# Altium PCB TX2_PowerBoard.PcbDoc
Units mil, origin at the board's own origin, x right, y up, seen from the top; angles counter-clockwise.
Board outline 2900 x 1800 mil, 2 copper layers (Top Layer, Bottom Layer); 31 components, 9 nets, 87 pads, 2 vias.
Unrouted connection lines stored in the file: 8.
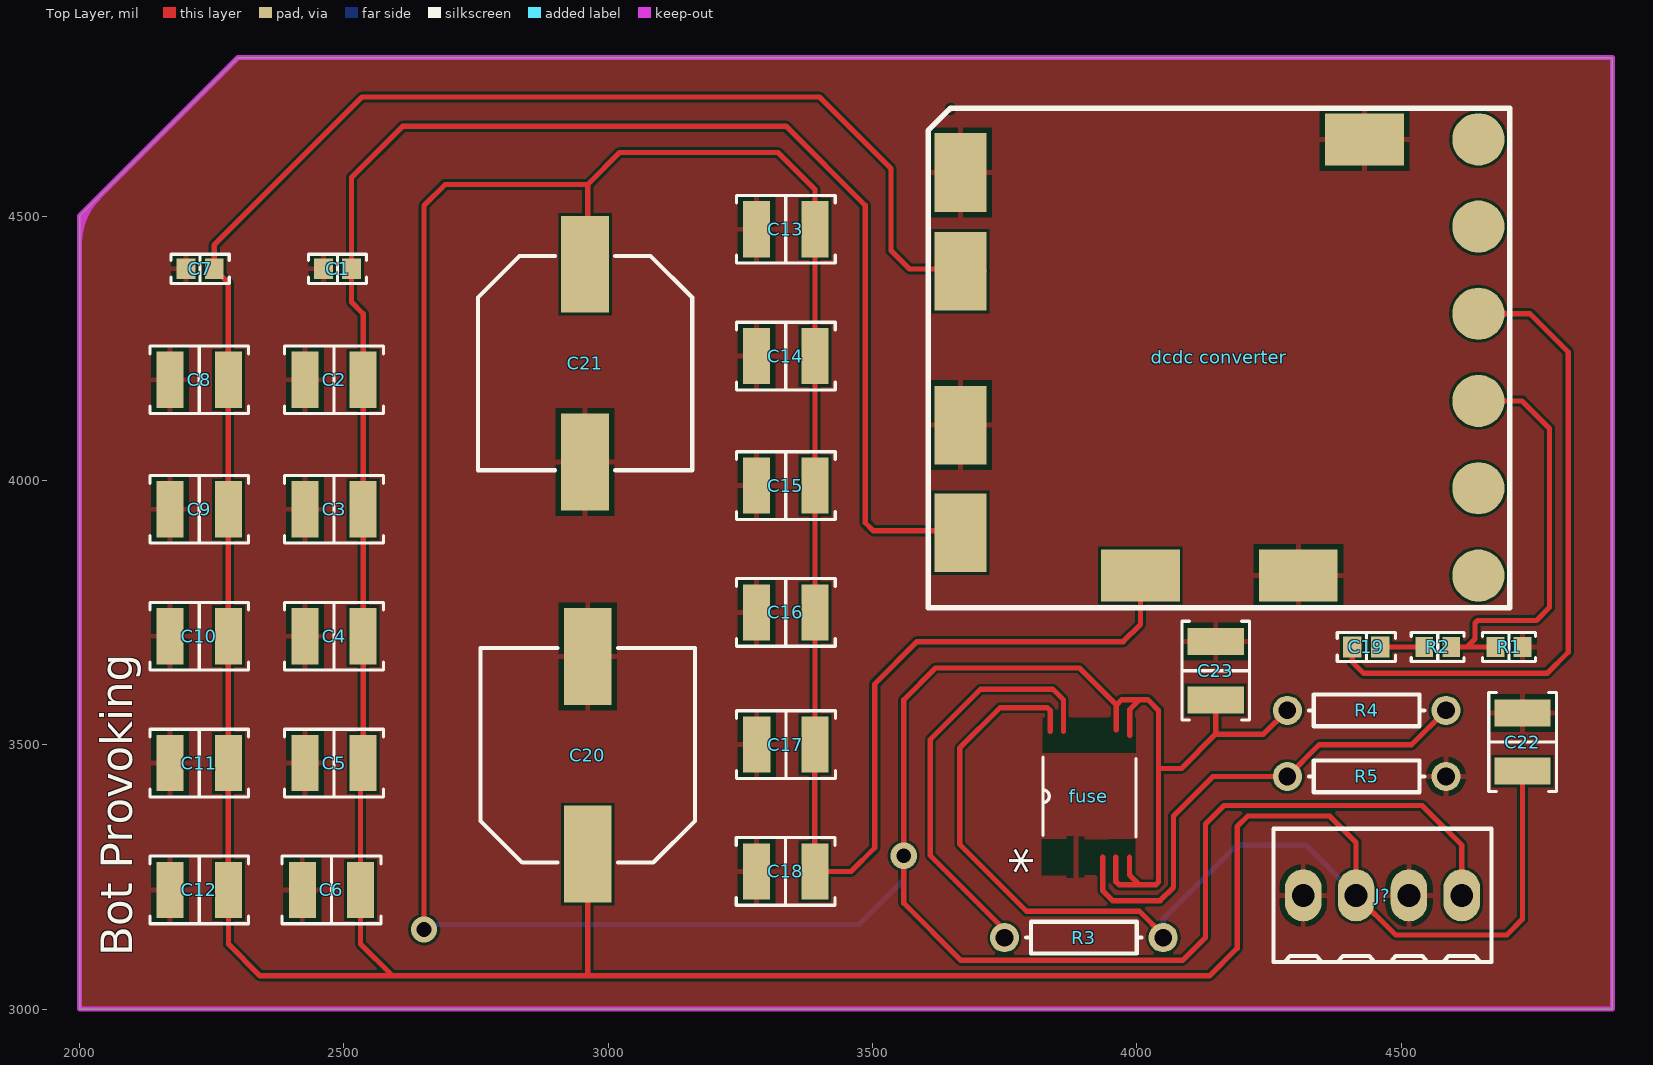
[diagram p0: Top Layer view]
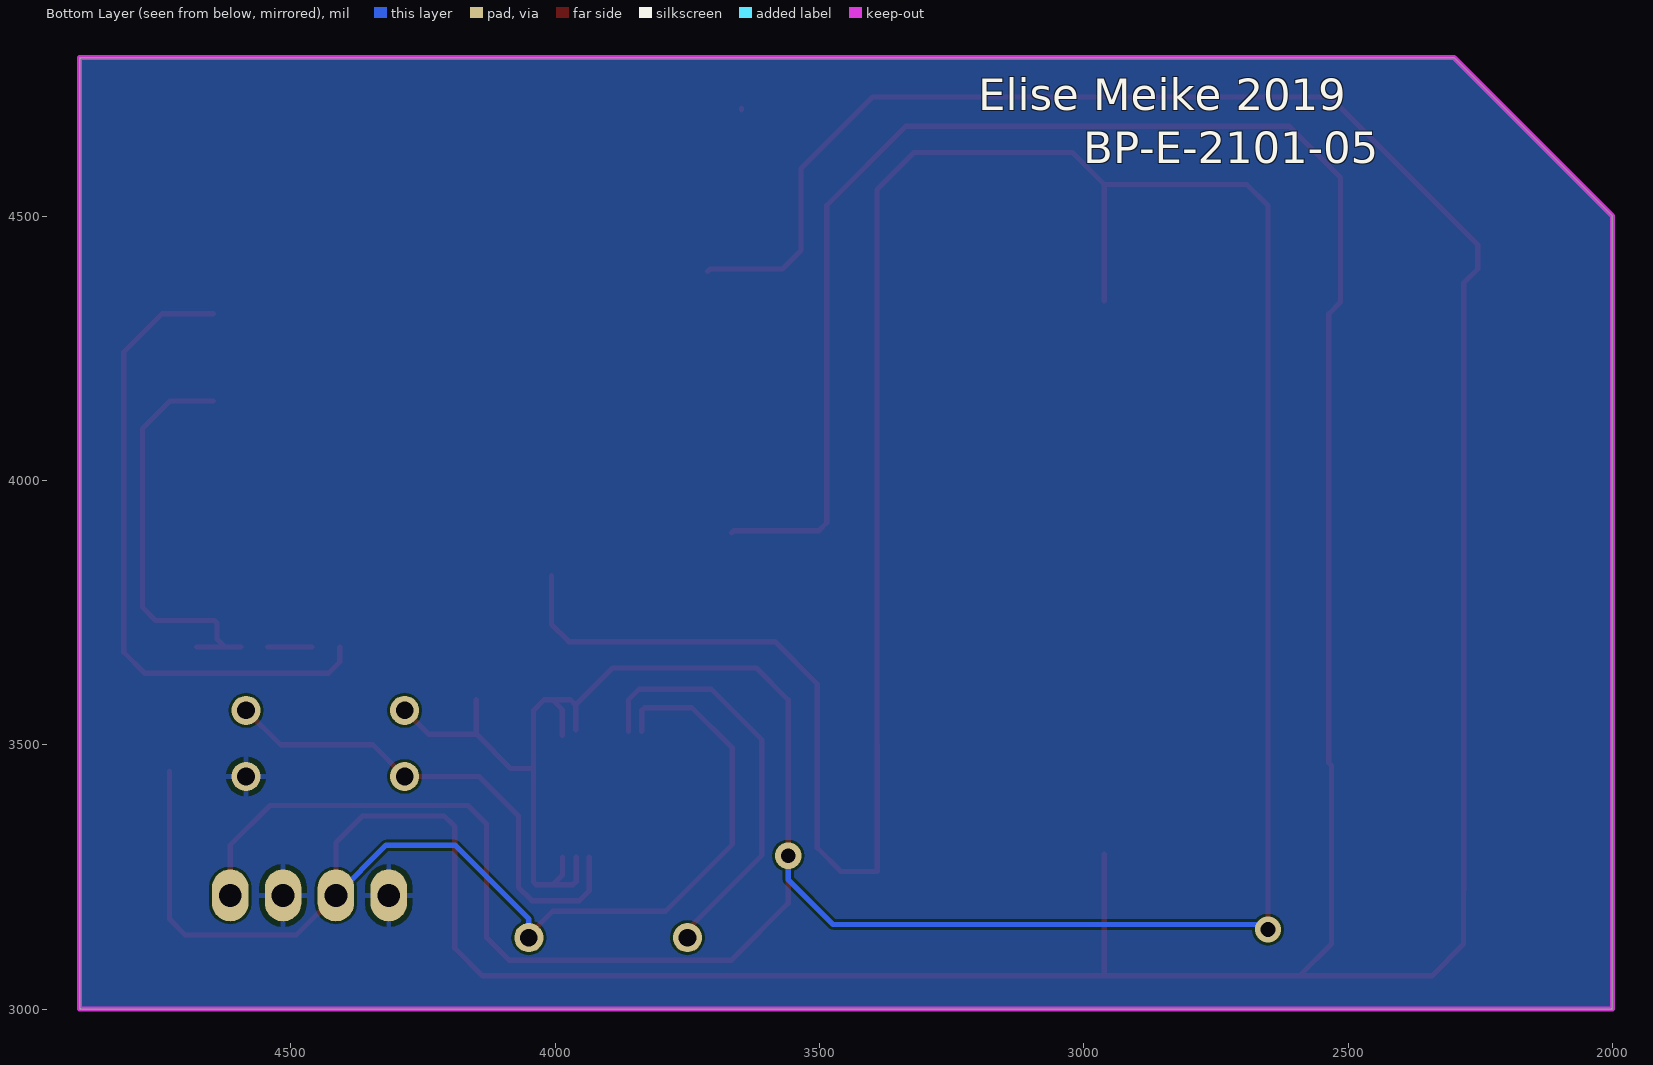
[diagram p1: Bottom Layer view, seen from below]
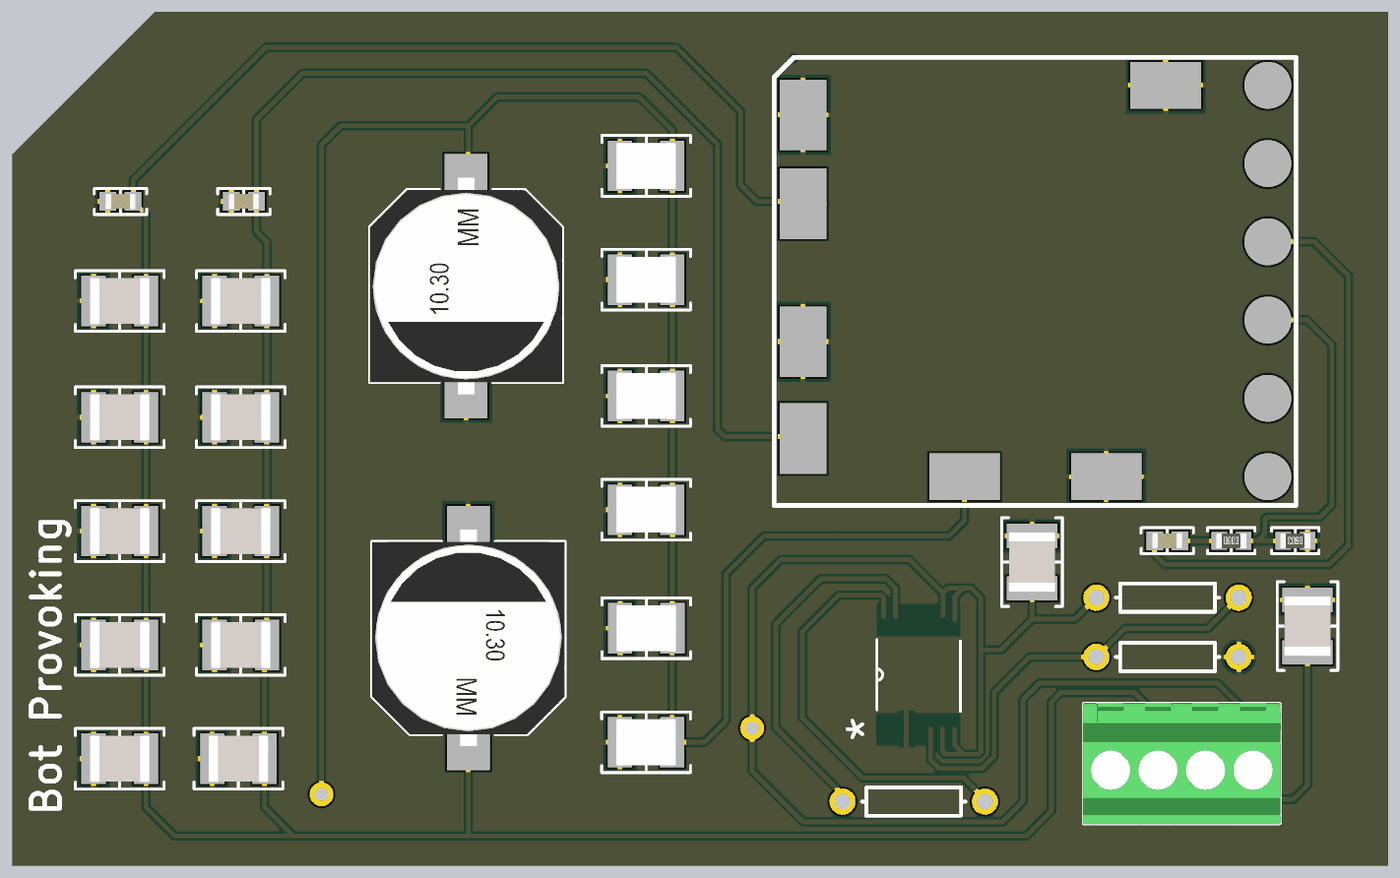
[diagram p2: 3D render of the assembled board from above, using the file's embedded part models]

## Layer stack, top to bottom
Top Solder: solder mask 0.4, Solder Resist, Dk 3.5
Top Layer: signal copper 1.4
Dielectric 1: dielectric 12.6, FR-4, Dk 4.8
Bottom Layer: signal copper 1.4
Bottom Solder: solder mask 0.4, Solder Resist, Dk 3.5

## Board outline
2000,4500 2300,4800 4900,4800 4900,3000 2000,3000

## Design rules (kind name [scope] priority, off if disabled: settings)
Clearance [All] p1: gap=5 ignorepadtopadclearanceinfootprint=FALSE except(0: Arc-Hole Track-Hole SMDPad-Hole THPad-Hole Via-Hole Fill-Hole Poly-Hole Region-Hole Text-Hole)
PolygonConnect [All] p1: connectstyle=Relief reliefconductorwidth=10 reliefentries=4 polygonreliefangle="90 Angle" airgapwidth=10
RoomDefinition TX2_PowerBoard [InComponentClass('TX2_PowerBoard')] p1: confinementstyle=ConfineIn formatcopy=TRUE lockcomponents=FALSE outline 1236.53,935.2 6906.53,935.2 6906.53,4955.04 1236.53,4955.04
RoutingVias [All] p1: holewidth=28 width=50 viastyle="Through Hole" minholewidth=28 minwidth=50 maxholewidth=28 maxwidth=50
SolderMaskExpansion [All] p1: expansion=4
Width [All] p1: maxlimit=10 minlimit=10 preferedwidth=10
30 further rules are at their usual default settings.

## Components (designator, comment, footprint, x,y, rotation, side; value= is the part's Value field where it differs from the comment)
C1 "0.047uF" "CAP 0603/1608" 2487.98,4400.35 r180 top
C2 "4.7uF" "CAP 1210/3225 - 2.2MM" 2481.41,4190.35 r0 top
C3 "4.7uF" "CAP 1210/3225 - 2.2MM" 2481.41,3945.35 r0 top
C4 "4.7uF" "CAP 1210/3225 - 2.2MM" 2481.41,3705.35 r0 top
C5 "4.7uF" "CAP 1210/3225 - 2.2MM" 2481.53,3465.35 r0 top
C6 "4.7uF" "CAP 1210/3225 - 2.2MM" 2476.53,3225.35 r0 top
C7 "0.047uF" "CAP 0603/1608" 2227.98,4400.35 r180 top
C8 "4.7uF" "CAP 1210/3225 - 2.2MM" 2226.41,4190.35 r0 top
C9 "4.7uF" "CAP 1210/3225 - 2.2MM" 2226.41,3945.35 r0 top
C10 "4.7uF" "CAP 1210/3225 - 2.2MM" 2226.41,3705.35 r0 top
C11 "4.7uF" "CAP 1210/3225 - 2.2MM" 2226.41,3465.35 r0 top
C12 "4.7uF" "CAP 1210/3225 - 2.2MM" 2226.41,3225.35 r0 top
C13 "4.7uF" "CAP 1210/3225 - 2.8MM" 3336.06,4475.35 r0 top
C14 "4.7uF" "CAP 1210/3225 - 2.8MM" 3336.06,4235.35 r0 top
C15 "4.7uF" "CAP 1210/3225 - 2.8MM" 3336.06,3990.35 r0 top
C16 "4.7uF" "CAP 1210/3225 - 2.8MM" 3336.06,3750.35 r0 top
C17 "4.7uF" "CAP 1210/3225 - 2.8MM" 3336.29,3500.35 r0 top
C18 "4.7uF" "CAP 1210/3225 - 2.8MM" 3335.82,3260.2 r0 top
C19 "470pF" "CAP 0603/1608" 4434.41,3685 r0 top
C20 "470uF" "CAP ALUM 10.3MM" 2961.41,3480 r90 top
C21 "470uF" "CAP ALUM 10.3MM" 2956.41,4222.01 r270 top
C22 "4.7uF" "CAP 1210/3225 - 2.2MM" 4730,3505 r270 top
C23 "4.7uF" "CAP 1210/3225 - 2.2MM" 4149.41,3640 r270 top
"dcdc converter" "DC to DC stepup converter" ABXS005S4X341-SRZ 4705.46,4704.25 r180 top
fuse "4 amp fuse" TSSOP-14 3910,3400 r90 top
J? "282834-4" "TE 282834-4" 4465,3215 r180 top
R1 "13.7k" "RES 0603/1608" 4704.41,3685 r180 top
R2 "200k" "RES 0603/1608" 4569.41,3685 r0 top
R3 "Res1" AXIAL-0.3 3900,3135 r0 top value=1K
R4 "Res1" AXIAL-0.3 4435,3565 r180 top value=1K
R5 "Res1" AXIAL-0.3 4435,3440 r180 top value=1K

## Footprints (in the part's own frame and the unit in brackets; to place one, negate y for a bottom-side part, rotate by r counter-clockwise, add the part's x,y. Pads: shape width x height; smd on the part's side, far side on the other; paste and mask are expansions set on the pad)
ABXS005S4X341-SRZ [mm]
  rect 3.78x2.51 smd: 1(10.15,22.46) 2(17.74,22.46) 7(6.97,1.5)
  rect 2.51x3.78 smd: 3(26.39,20.41) 4(26.39,15.23) 5(26.39,7.84) 6(26.39,3.09)
  round 2.51 smd: 8(1.5,1.5) 9(1.5,5.69) 10(1.5,9.88) 11(1.5,14.07) 12(1.5,18.26) 13(1.5,22.46)
  Top Layer lines w0.254: 26.87,0.073 26.87,0
  silkscreen extent 0,0 27.94,24
AXIAL-0.3 [mm] "Axial Device, Thru-Hole; 2 Leads; 0.3 in Pin Spacing"
  round 1.4 hole 0.85: 1(-3.81,0) 2(3.81,0)
  silkscreen extent -2.77,-0.76 2.77,0.76
"CAP 0603/1608" [mm] "Chip Capacitor, 2-Leads, Body 1.60x0.80mm, IPC Medium Density"
  rect 0.9x1 smd: 1(-0.675,0) 2(0.675,0)
  silkscreen extent -1.4,-0.7 1.4,0.7, body extent -0.8,-0.41 0.8,0.41, height 0.82
"CAP 1210/3225 - 2.2MM" [mm] "Chip Capacitor, 2-Leads, Body 3.20x2.50mm, IPC Medium Density"
  rect 1.3x2.7 smd: 1(-1.4,0) 2(1.4,0)
  silkscreen extent -2.37,-1.63 2.37,1.63, body extent -1.6,-1.25 1.6,1.25, height 2.2
"CAP 1210/3225 - 2.8MM" [mm] "Chip Capacitor, 2-Leads, Body 3.20x2.50mm, IPC Medium Density"
  rect 1.3x2.7 smd: 1(-1.4,0) 2(1.4,0)
  silkscreen extent -2.37,-1.63 2.37,1.63, body extent -1.6,-1.25 1.6,1.25, height 2.8
"CAP ALUM 10.3MM" [mm] "Aluminum Electrolytic Capacitor, Body 10.30x10.30x10.50mm, IPC Low Density"
  rect 4.65x2.3 smd: 1(-4.75,0) 2(4.75,0)
  silkscreen extent -5.15,-5.15 5.15,5.15, body extent -5.8,-5.15 5.8,5.15, height 10.5
"RES 0603/1608" [mm] "Chip Resistor, 2-Leads, Body 1.60x0.80mm, IPC Medium Density"
  rect 0.85x0.95 smd: 1(-0.65,0) 2(0.65,0)
  silkscreen extent -1.27,-0.7 1.27,0.7, body extent -0.8,-0.4 0.8,0.4, height 0.45
"TE 282834-4" [mm]
  oval 1.75x2.5 hole 1.1: 1(-3.81,0) 2(-1.27,0) 3(1.27,0) 4(3.81,0)
  silkscreen extent -5.24,-3.2 5.24,3.2, body extent -5.31,-3.25 5.31,3.25, height 10
TSSOP-14 [mil]
  rect 58x14 on Mech1: 1(-112.5,77.5) 2(-112.5,51.5) 3(-112.5,25.5) 4(-112.5,0.5) 5(-112.5,-25.5) 6(-112.5,-50.5) 7(-112.5,-76.5) 8(117.75,-76.75) 9(117.5,-51.5) 10(117.5,-25.5) 11(117.5,0.5) 12(117.5,25.5) 13(117.5,51.5) 14(117.5,76.5)
  silkscreen extent -74,-88 76,88

## Part data
C1 C7: library part GCM188R71H473KA55D, "CAP CER 0.047UF 50V X7R 0603", Device Package="0603 (1608 Metric)", Manufacturer="Murata Electronics North America", Supplier Part Number 1=490-4934-2-ND, TemperatureCoefficient=X7R, TemperatureRange="-55C ~ 125C", Tolerance=10%, Voltage=50V, ComponentLink1Description=Datasheet, ComponentLink1URL=http://www.murata.com/~/media/webrenewal/support/library/catalog/products/capacitor/mlcc/c03e.ashx, ComponentLink2Description="Digi-Key Listing", ComponentLink2URL=https://www.digikey.com/product-detail/en/murata-electronics-north-america/GCM188R71H473KA55D/490-4934-2-ND/1765182, PartId=12944, Part Number=GCM188R71H473KA55D, Price=0.0193, Supplier 1=Digi-Key
C2 C3 C4 C5 C6 C8 C9 C10 C11 C12 C22 C23: library part GCM32DR71E475KA55L, "CAP CER 4.7UF 25V X7R 1210", Device Package="1210 (3225 Metric)", Manufacturer="Murata Electronics North America", Supplier Part Number 1=490-8063-2-ND, TemperatureCoefficient=X7R, TemperatureRange="-55C ~ 125C", Tolerance=10%, Voltage=25V, ComponentLink1Description=Datasheet, ComponentLink1URL=http://www.murata.com/~/media/webrenewal/support/library/catalog/products/capacitor/mlcc/c03e.ashx, ComponentLink2Description="Digi-Key Listing", ComponentLink2URL=https://www.digikey.com/product-detail/en/murata-electronics-north-america/GCM32DR71E475KA55L/490-8063-2-ND/2592481, PartId=18697, Part Number=GCM32DR71E475KA55L, Price=0.428, Supplier 1=Digi-Key
C13 C14 C15 C16 C17 C18: library part GCM32ER71H475KA55K, "CAP CER 4.7UF 50V X7R 1210", Device Package="1210 (3225 Metric)", Manufacturer="Murata Electronics North America", Supplier Part Number 1=490-8066-2-ND, TemperatureCoefficient=X7R, TemperatureRange="-55C ~ 125C", Tolerance=10%, Voltage=50V, ComponentLink1Description=Datasheet, ComponentLink1URL=http://www.murata.com/~/media/webrenewal/support/library/catalog/products/capacitor/mlcc/c03e.ashx, ComponentLink2Description="Digi-Key Listing", ComponentLink2URL=https://www.digikey.com/product-detail/en/murata-electronics-north-america/GCM32ER71H475KA55K/490-8066-2-ND/2592491, PartId=19150, Part Number=GCM32ER71H475KA55K, Price=0.6447, Supplier 1=Digi-Key
C19: library part GCM1885C2A471JA16D, "CAP CER 470PF 100V NP0 0603", Device Package="0603 (1608 Metric)", Manufacturer="Murata Electronics North America", Supplier Part Number 1=490-4949-2-ND, TemperatureCoefficient="C0G, NP0", TemperatureRange="-55C ~ 125C", Tolerance=5%, Voltage=100V, ComponentLink1Description=Datasheet, ComponentLink1URL=http://www.murata.com/~/media/webrenewal/support/library/catalog/products/capacitor/mlcc/c03e.ashx, ComponentLink2Description="Digi-Key Listing", ComponentLink2URL=https://www.digikey.com/product-detail/en/murata-electronics-north-america/GCM1885C2A471JA16D/490-4949-2-ND/1765197, PartId=13595, Part Number=GCM1885C2A471JA16D, Price=0.0279, Supplier 1=Digi-Key
C20: library part EEE-1EA471P, "CAP ALUM 470UF 20% 25V SMD", Device Package="Radial, Can - SMD", Lifetime @ Temp="2000 Hrs @ 85C", Manufacturer="Panasonic Electronic Components", Ripple Current=380mA, Supplier Part Number 1=PCE3909TR-ND, TemperatureRange="-40C ~ 85C", Tolerance=20%, Voltage=25V, ComponentLink1Description=Datasheet, ComponentLink1URL=http://media.digikey.com/pdf/Data%20Sheets/Panasonic%20Electronic%20Components/S_Series_Type_V.pdf, ComponentLink2Description="Digi-Key listing", ComponentLink2URL=http://digikey.com/product-detail/en/EEE-1EA471P/PCE3909TR-ND/766076, Impedance=-, PartId=7417, Part Number=EEE-1EA471P, Price=0.3451, Supplier 1=Digi-Key, Type=Automotive
C21: library part EEE-1EA471UAP, "CAP ALUM 470UF 20% 25V SMD", Device Package="Radial, Can - SMD", Lifetime @ Temp="1000 Hrs @ 85C", Manufacturer="Panasonic Electronic Components", Ripple Current=380mA, Supplier Part Number 1=PCE4605TR-ND, TemperatureRange="-40C ~ 85C", Tolerance=20%, Voltage=25V, ComponentLink1Description=Datasheet, ComponentLink1URL=http://media.digikey.com/pdf/Data%20Sheets/Panasonic%20Electronic%20Components/S_Series_Type_V.pdf, ComponentLink2Description="Digi-Key listing", ComponentLink2URL=http://digikey.com/product-detail/en/EEE-1EA471UAP/PCE4605TR-ND/1717771, Impedance=-, PartId=7429, Part Number=EEE-1EA471UAP, Price=0.3725, Supplier 1=Digi-Key, Type="High Temperature Reflow"
"dcdc converter": library part ABXS005S4X341-SRZ
fuse: library part TSSOP-14
J?: "TERM BLOCK 4POS SIDE ENT 2.54MM", Part Number=282834-4
R1: library part ERJ-3EKF1372V, "RES SMD 13.7K OHM 1% 1/10W 0603", Device Package="0603 (1608 Metric)", Manufacturer="Panasonic Electronic Components", PowerRating="0.1W, 1/10W", Supplier Part Number 1=P13.7KHTR-ND, TemperatureCoefficient=100ppm/C, TemperatureRange="-55C ~ 155C", Tolerance=1%, ComponentLink1Description=Datasheet, ComponentLink1URL=http://industrial.panasonic.com/www-cgi/jvcr13pz.cgi?E+PZ+3+AOA0002+ERJ3EKF1372V+7+WW, ComponentLink2Description="Digi-Key listing", ComponentLink2URL=http://digikey.com/product-detail/en/ERJ-3EKF1372V/P13.7KHTR-ND/196114, PartId=1167, Part Number=ERJ-3EKF1372V, Price=0.0038, Supplier 1=Digi-Key, Type="Thick Film"
R2: library part ERJ-3EKF2003V, "RES SMD 200K OHM 1% 1/10W 0603", Device Package="0603 (1608 Metric)", Manufacturer="Panasonic Electronic Components", PowerRating="0.1W, 1/10W", Supplier Part Number 1=P200KHTR-ND, TemperatureCoefficient=100ppm/C, TemperatureRange="-55C ~ 155C", Tolerance=1%, ComponentLink1Description=Datasheet, ComponentLink1URL=http://industrial.panasonic.com/www-cgi/jvcr13pz.cgi?E+PZ+3+AOA0002+ERJ3EKF2003V+7+WW, ComponentLink2Description="Digi-Key listing", ComponentLink2URL=http://digikey.com/product-detail/en/ERJ-3EKF2003V/P200KHTR-ND/196206, PartId=906, Part Number=ERJ-3EKF2003V, Price=0.0038, Supplier 1=Digi-Key, Type="Thick Film"
R3 R4 R5: "Resistor", LatestRevisionDate=17-Jul-2002, LatestRevisionNote="Re-released for DXP Platform.", PackageDescription="Axial Device, Thru-Hole; 2 Leads; 0.3 in Pin Spacing", PackageReference=AXIAL-0.3, Published=8-Jun-2000, Publisher="Altium Limited"

## Via types
v1: diameter 50, hole 28, Top Layer to Bottom Layer, 2 vias

## Nets (pads, with @x,y where several pads share a name; then routed paths per layer and width w, separated by ;. In a path a pad name is that pad's centre, name@x,y a point inside that pad or via, vN(x,y) a via of type N, cw(c..) or ccw(c..) an arc to the next point about the centre after c; other vN are vias at no path point)
GND: "dcdc converter.1" "dcdc converter.4" "dcdc converter.6" "dcdc converter.7" C1.2 C2.1 C3.1 C4.1 C5.1 C6.1 C7.2 C8.1 C9.1 C10.1 C11.1 C12.1 C13.1 C14.1 C15.1 C16.1 C17.1 C18.1 C20.2 C21.2 C22.1 C23.1 J?.2 J?.4 R1.1 R5.1
NetC19_1: "dcdc converter.10" C19.1 | length 1230.4
  Top Layer w10: C19.1 4407.83,3656.57 4429.41,3635 4776.41,3635 4816.41,3675 4816.41,4243 4744.13,4315.28 4646.41,4315.28
NetC19_2: C19.2 R2.1 | length 82.8
  Top Layer w10: C19.2 R2.1
"Netdcdc converter_11": "dcdc converter.11" R1.2 R2.2 | length 783.1
  Top Layer w10: R2.2 4625,3685 ; 4646.41,4150.31 4729.09,4150.31 4781.09,4098.31 4781.09,3760 4756.09,3735 4645,3735 4640,3730 4640,3700 4625,3685 ; R1.2 4625,3685
Netfuse_5: R4.1 R5.2 | length 949.1
  Top Layer w10: 3935.5,3287.5 3935.5,3223.91 3954.41,3205 4044.41,3205 4069.41,3230 4069.41,3365 4144.41,3440 R5.2 4345,3500 4520,3500 R4.1
Netfuse_13: R3.1 | length 787.7
  Top Layer w10: R3.1@3750,3140 3750,3150 3609.41,3290.59 3609.41,3509.72 3704.69,3605 3841.41,3605 3861.41,3585 3861.41,3525
ON/OFF: "dcdc converter.12"
VIN: "dcdc converter.3" "dcdc converter.5" C1.1 C2.2 C3.2 C4.2 C5.2 C6.2 C7.1 C8.2 C9.2 C10.2 C11.2 C12.2 C20.1 C22.2 J?.3 R3.2 | length 11329.8
  Top Layer w10: 2590.72,3064.05 2531.65,3123.12 C6.2 2531.65,3460.35 C5.2 2536.53,3465.47 C4.2 C3.2 C2.2 2536.53,4315.24 2514.56,4337.2 C1.1 2514.56,4573.15 2611.61,4670.2 3336.57,4670.2 3486.41,4520.35 3486.41,3920 3501.41,3905 3662.2,3905 3666.49,3900.71 ; C20.1 2961.41,3062.74 ; 3712.04,4395.59 3707.63,4400 3570,4400 3535,4435 3535,4589.91 3399.72,4725.2 2534.4,4725.2 2254.56,4445.35 C7.1 2281.53,4373.39 C8.2 C9.2 C10.2 C11.2 C12.2 2281.65,3225.24 2281.65,3122.76 2341.67,3062.74 2961.41,3062.74 ; 3836.41,3525 3836.41,3565 3831.41,3570 3741.41,3570 3665,3493.59 3665,3311.6 3791.6,3185 4005,3185 R3.2@4050,3140 ; C22.2 4730,3170 4700,3140 4490,3140 J?.3 4415,3315 4365,3365 4210,3365 4190,3345 4190,3115 4137.74,3062.74 2961.41,3062.74
  Bottom Layer w10: R3.2 4050,3170 4190,3310 4320,3310 J?.3
VOUT: "dcdc converter.2" C13.2 C14.2 C15.2 C16.2 C17.2 C18.2 C21.1 C23.2 J?.1 R4.2 | length 9165.4
  Top Layer w10: v1(2651.65,3150.35) 2651.65,4519.76 2691.88,4560 2961.41,4560 ; C21.1@2961.41,4340 2961.41,4560 ; 3960.5,3287.5 3960.5,3240.91 3966.41,3235 4005,3235 ; 3961.41,3528 3961.41,3575 ; 3986.5,3287.5 3986.5,3253.5 4005,3235 ; 3986.75,3517.75 3986.75,3566.75 4005,3585 ; 4007.04,3820 4007.04,3727.63 3974.41,3695 3584.41,3695 3504.41,3615 3504.41,3305 3459.61,3260.2 C18.2 3390.94,3499.88 C17.2 3391.17,3500.59 C16.2 C15.2 C14.2 C13.2 3391.17,4550.47 3321.29,4620.35 3021.76,4620.35 2961.41,4560 ; C23.2 4149.41,3520 ; R4.2 4240,3520 4149.41,3520 ; J?.1 4615,3310 4540,3385 4165,3385 4130,3350 4130,3135 4087.44,3092.44 3666.97,3092.44 3559.41,3200 v1(3559.41,3290) 3559.41,3585 3619.41,3645 3891.41,3645 3961.41,3575 ; 3961.41,3575 3971.41,3585 4005,3585 ; 4005,3235 4036.41,3235 4041.41,3240 4041.41,3455 ; 4005,3585 4021.41,3585 4041.41,3565 4041.41,3455 ; 4041.41,3455 4084.41,3455 4149.41,3520
  Bottom Layer w10: v1(2651.65,3150.35) 2661.29,3160 3474.41,3160 3559.41,3245 v1(3559.41,3290)
pads on no net: "dcdc converter.8" "dcdc converter.9" "dcdc converter.13" fuse.1 fuse.2 fuse.3 fuse.4 fuse.5 fuse.6 fuse.7 fuse.8 fuse.9 fuse.10 fuse.11 fuse.12 fuse.13 fuse.14

## Polygon pours and split planes (outlines as drawn)
GND on Top Layer "Top Layer-GND" (solid, pour order 4): 2300,4800 2000,4500 2000,3000 4900,3000 4900,4800
GND on Bottom Layer "Bottom Layer-GND" (solid, pour order 6): 2300,4800 2000,4500 2000,3000 4900,3000 4900,4800

## Keep-outs
Top Layer:
  lines w10: 2000,4500 2300,4800 ; 2300,4800 4900,4800 4900,3000 2000,3000 2000,4450 cw(c2120.71,4450) 2035.36,4535.36 2300,4800
Keep-Out Layer:
  lines w10: 3850,4800 4900,4800 ; 2300,4800 4900,4800 ; 2300,4800 2000,4500 2000,3000 4900,3000 4900,4800 ; 2300,4800 4900,4800

## Silkscreen, mask and mechanical layers (free items; w line width, h text height)
Top Overlay:
  text "Bot Provoking" at 2100,3100 h60 r90
Bottom Overlay:
  text "Elise Meike 2019" at 3200,4700 h60
  text "BP-E-2101-05" at 3001.41,4600 h60

## Text inside footprints (layer, text, board x,y; h text height)
fuse: Top Overlay "*" at 3834.34,3254.5 h73.82 r90; Mechanical 4 "*" at 3834.34,3254.5 h73.82 r90; Mechanical 4 "*" at 3834.34,3254.5 h73.82 r90